# Altium PCB PCB1.PcbDoc
Units mil, origin at the board's own origin, x right, y up, seen from the top; angles counter-clockwise.
Board outline 4675 x 2520 mil, 2 copper layers (Top Layer, Bottom Layer); 66 components, 45 nets, 200 pads, 19 vias.
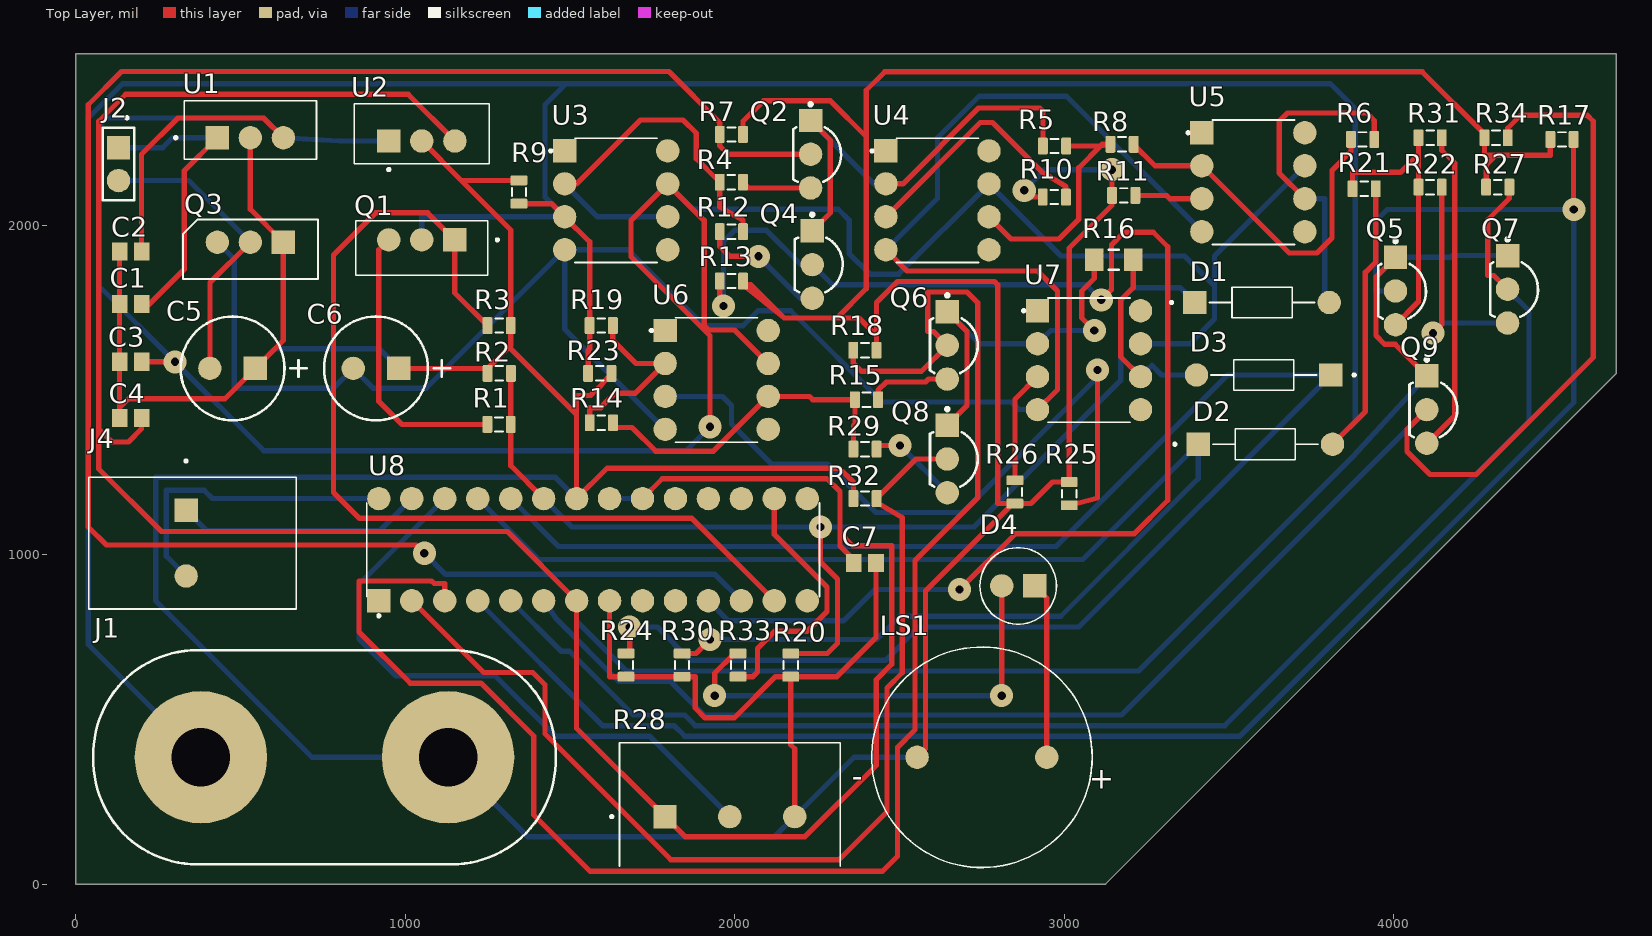
[diagram p0: Top Layer view]
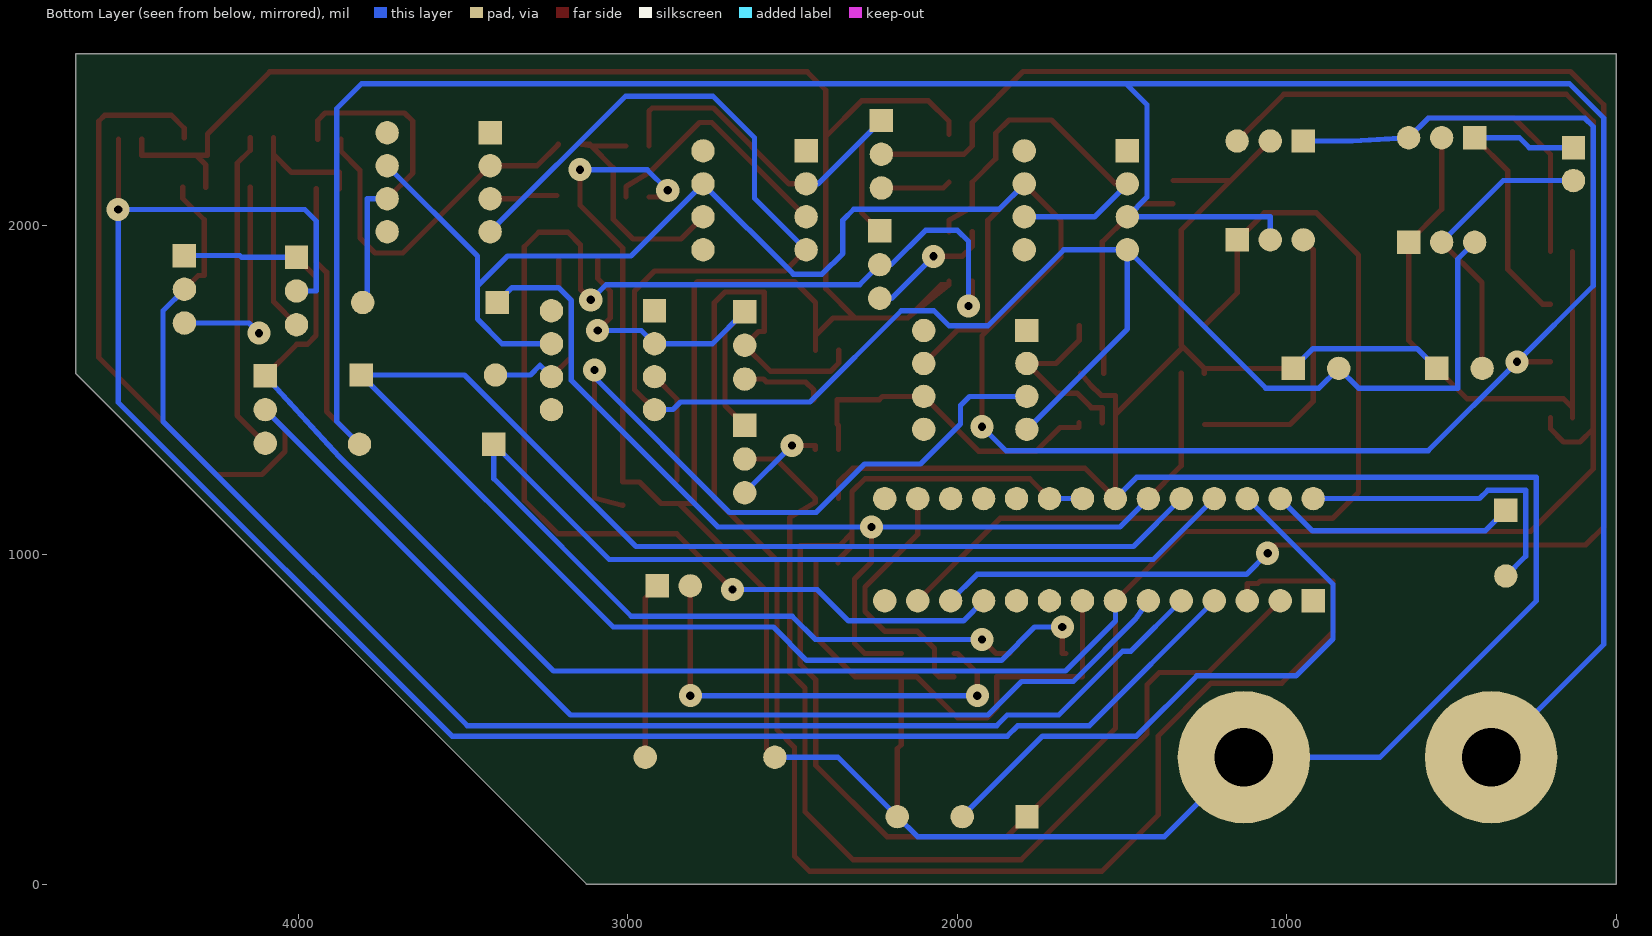
[diagram p1: Bottom Layer view, seen from below]
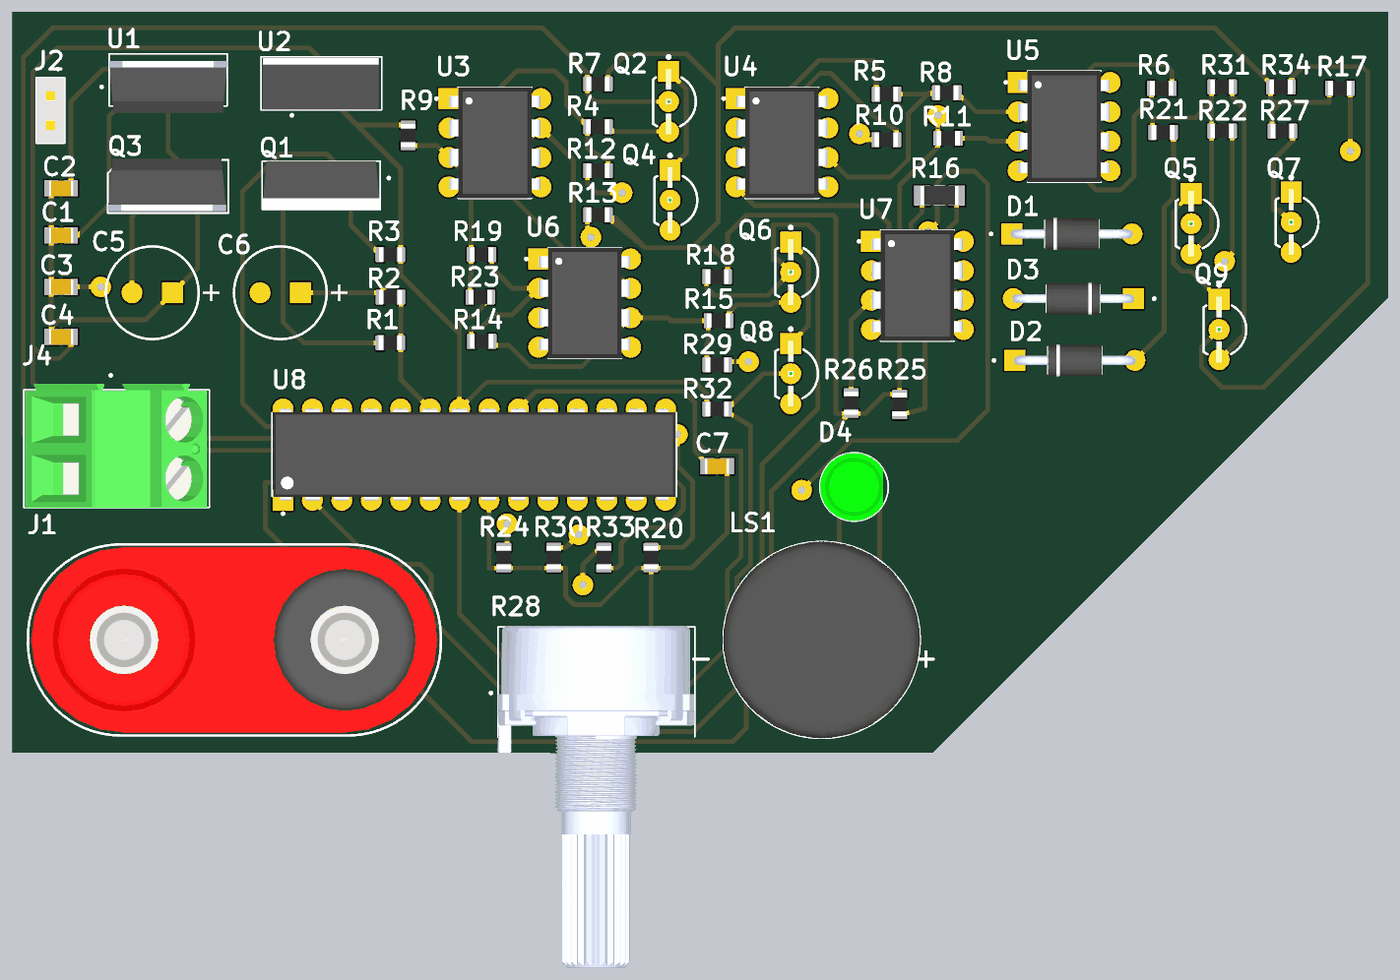
[diagram p2: 3D render of the assembled board from above, using the file's embedded part models]

## Layer stack, top to bottom
Top Solder: solder mask 0.4, Solder Resist, Dk 3.5
Top Layer: signal copper 1.4
Dielectric 1: dielectric 12.6, FR-4, Dk 4.8
Bottom Layer: signal copper 1.4
Bottom Solder: solder mask 0.4, Solder Resist, Dk 3.5

## Board outline
0,0 0,2520 4675,2520 4675,1550 3125,0

## Design rules (kind name [scope] priority, off if disabled: settings)
Clearance [All] p1: gap=16 ignorepadtopadclearanceinfootprint=FALSE
PolygonConnect [All] p1: connectstyle=Relief reliefconductorwidth=10 reliefentries=4 polygonreliefangle="90 Angle" airgapwidth=10
RoutingVias [All] p1: holewidth=25 width=70 viastyle="Through Hole" minholewidth=25 minwidth=70 maxholewidth=25 maxwidth=70
SolderMaskExpansion [All] p1: expansion=6 istentingtop=FALSE
SupplyNets "Schematic Supply Nets_3" [InNet('GND')] p1: voltage=0.000
SupplyNets "Schematic Supply Nets_2" [InNet('+5')] p2: voltage=0.000
SupplyNets "Schematic Supply Nets_1" [InNet('+8')] p3: voltage=0.000
SupplyNets "Schematic Supply Nets" [InNet('-8')] p4: voltage=0.000
Width [All] p1: maxlimit=16 minlimit=16 preferedwidth=16 minimp=50.000000 maximp=50.000000 favimp=50.000000
30 further rules are at their usual default settings.

## Components (designator, comment, footprint, x,y, rotation, side; value= is the part's Value field where it differs from the comment)
C1 "Capacitor 1 uF +/- 10% 50 V 0805" CAPC2013X135X45NL10T25 166.54,1760 r0 top value=0.33µF
C2 "Capacitor 1 uF +/- 10% 50 V 0805" CAPC2013X135X45NL10T25 166.54,1920 r0 top value=0.1µF
C3 "Capacitor 1 uF +/- 10% 50 V 0805" CAPC2013X135X45NL10T25 166.54,1585 r0 top value=0.33µF
C4 "Capacitor 1 uF +/- 10% 50 V 0805" CAPC2013X135X45NL10T25 166.54,1415 r0 top value=0.1µF
C5 "ECA-2AM470" CAPPR65-350-1150X800X1250 476.1,1565 r180 top value=1µF
C6 "ECA-2AM470" CAPPR65-350-1150X800X1250 911.1,1565 r180 top value=1µF
C7 "Capacitor 1 uF +/- 10% 50 V 0805" CAPC2013X135X45NL10T25 2395,975 r180 top value=0.1µF
D1 "1N4733A" DIOAD1036W78L463D272 3600,1765 r0 top
D2 "1N4733A" DIOAD1036W78L463D272 3610,1335 r0 top
D3 "1N4733A" DIOAD1036W78L463D272 3605,1545 r180 top
D4 "Green" LEDRD254W50D500H1060 2860,905 r180 top
J1 "CMP-73906-000010-1_1" FP-2269-2-MFG 755,385 r0 top
J2 "SSW-102-01-X-S" SAMTEC_SSW-102-01-X-S 130,2185 r270 top
J4 "1713723" PHOENIX_1713723 39.72,1235 r270 top
LS1 "PKM17EPP-2002-B0" SPKR_PKM17EPP-2002-B0 2750,385 r180 top
Q1 "IRF3710PBF" TO254P1016X419X2057-3 1050,1955 r180 top
Q2 "2N7000" ONSC-TO-92-3-29-11_AM_BL 2230,2215 r270 top
Q3 "L7908CV" TO254P450X1020X1935-3P 430,1905 r180 top
Q4 "2N7000" ONSC-TO-92-3-29-11_AM_BL 2235,1880 r270 top
Q5 "2N7000" ONSC-TO-92-3-29-11_AM_BL 4005,1800 r270 top
Q6 "2N7000" ONSC-TO-92-3-29-11_AM_BL 2645,1635 r270 top
Q7 "2N7000" ONSC-TO-92-3-29-11_AM_BL 4345,1805 r270 top
Q8 "2N7000" ONSC-TO-92-3-29-11_AM_BL 2645,1290 r270 top
Q9 "2N7000" ONSC-TO-92-3-29-11_AM_BL 4100,1440 r270 top
R1 "1KR5J" RESC0805(2012)_L 1284.57,1395 r180 top value=6.8M
R2 "1KR5J" RESC0805(2012)_L 1285.04,1550 r180 top value=1.5M
R3 "1KR5J" RESC0805(2012)_L 1285,1695 r0 top value=10k
R4 "1KR5J" RESC0805(2012)_L 1989.57,2130 r180 top value=10k
R5 "1KR5J" RESC0805(2012)_L 2970,2240 r180 top value=10k
R6 "1KR5J" RESC0805(2012)_L 3905,2260 r180 top value=1k
R7 "1KR5J" RESC0805(2012)_L 1989.96,2275 r0 top value=10k
R8 "1KR5J" RESC0805(2012)_L 3175.04,2245 r180 top value=1k
R9 "1KR5J" RESC0805(2012)_L 1345,2100 r270 top value=10M
R10 "1KR5J" RESC0805(2012)_L 2969.57,2085 r180 top value=100R
R11 "1KR5J" RESC0805(2012)_L 3180.04,2090 r180 top value=100R
R12 "1KR5J" RESC0805(2012)_L 1989.96,1980 r0 top value=1k
R13 "1KR5J" RESC0805(2012)_L 1990,1830 r0 top value=10k
R14 "1KR5J" RESC0805(2012)_L 1595,1400 r180 top value=10k
R15 "1KR5J" RESC0805(2012)_L 2399.57,1470 r180 top value=10k
R16 "Resistor 1k +/-1% 1206 250 mW" RESC3116X70X50ML13T20 3150,1895 r180 top value=18k
R17 "1KR5J" RESC0805(2012)_L 4510,2260 r180 top value=10k
R18 "1KR5J" RESC0805(2012)_L 2395,1620 r0 top value=10k
R19 "1KR5J" RESC0805(2012)_L 1594.57,1695 r180 top value=1k
R20 "1KR5J" RESC0805(2012)_L 2170,665 r90 top value=10k
R21 "1KR5J" RESC0805(2012)_L 3909.96,2110 r0 top value=499R
R22 "1KR5J" RESC0805(2012)_L 4110,2115 r180 top value=49.9k
R23 "1KR5J" RESC0805(2012)_L 1590.43,1550 r0 top value=1R
R24 "1KR5J" RESC0805(2012)_L 1670,665 r90 top value=10k
R25 "1KR5J" RESC0805(2012)_L 3015,1185 r90 top value=100R
R26 "1KR5J" RESC0805(2012)_L 2850,1190 r270 top value=100R
R27 "1KR5J" RESC0805(2012)_L 4315,2115 r180 top value=10k
R28 "PTN16-A10220K1B1" POT_PTN16-A10220K1B1 1788.15,205 r0 top
R29 "1KR5J" RESC0805(2012)_L 2395,1320 r180 top value=1k
R30 "1KR5J" RESC0805(2012)_L 1840,664.96 r90 top value=10k
R31 "1KR5J" RESC0805(2012)_L 4110.04,2265 r180 top value=560k
R32 "1KR5J" RESC0805(2012)_L 2395,1170 r180 top value=10k
R33 "1KR5J" RESC0805(2012)_L 2010,665 r90 top value=100R
R34 "1KR5J" RESC0805(2012)_L 4310,2265 r180 top value=10k
U1 "L7808CV" TO255P1020X450X1968-3B 530,2265 r0 top
U2 "L7805CV" TO255P1040X460X1968-3 950,2255 r0 top
U3 "TL081CP" DIP794W45P254L959H508Q8 1640,2075 r0 top
U4 "TL081CP" DIP794W45P254L959H508Q8 2615,2075 r0 top
U5 "TL081CP" DIP794W45P254L959H508Q8 3573.7,2130 r0 top
U6 "TL081CP" DIP794W45P254L959H508Q8 1945,1530 r0 top
U7 "TL081CP" DIP794W45P254L959H508Q8 3075,1590 r0 top
U8 "ATMEGA328-PU" DIP787W46P254L3467H508Q28 1570,1015 r90 top

## Footprints (in the part's own frame and the unit in brackets; to place one, negate y for a bottom-side part, rotate by r counter-clockwise, add the part's x,y. Pads: shape width x height; smd on the part's side, far side on the other; paste and mask are expansions set on the pad)
CAPC2013X135X45NL10T25 [mm] "Chip Capacitor, 2-Leads, Body 2.10x1.35mm, IPC Medium Density"
  rect 1.2x1.4 smd: 1(-0.85,0) 2(0.85,0)
  body extent -1.05,-0.67 1.05,0.67, height 1.35
CAPPR65-350-1150X800X1250 [mil] "THD, 2-Leads, Dia 8mm, Pin Spacing 3.5mm"
  rect 71x71 all layers, no hole: 1(-68.9,0)
  round 71 all layers, no hole: 2(68.9,0)
  silkscreen extent -225,-157 157,157, body extent -157,-157 155,157, height 492
DIOAD1036W78L463D272 [mil]
  rect 71x71 all layers, no hole: 1(-203.94,0)
  round 71 all layers, no hole: 2(203.94,0)
  silkscreen extent -279,-47 160,47, body extent -208,-54 208,54, height 107
DIP787W46P254L3467H508Q28 [mil]
  rect 71x71 all layers, no hole: 1(-155,650)
  round 71 all layers, no hole: 2(-155,550) 3(-155,450) 4(-155,350) 5(-155,250) 6(-155,150) 7(-155,50) 8(-155,-50) 9(-155,-150) 10(-155,-250) 11(-155,-350) 12(-155,-450) 13(-155,-550) 14(-155,-650) 15(155,-650) 16(155,-550) 17(155,-450) 18(155,-350) 19(155,-250) 20(155,-150) 21(155,-50) 22(155,50) 23(155,150) 24(155,250) 25(155,350) 26(155,450) 27(155,550) 28(155,650)
  silkscreen extent -205,-687 143,687, body extent -156,-682 156,682, height 180
DIP794W45P254L959H508Q8 [mil]
  rect 71x71 all layers, no hole: 1(-156.3,150)
  round 71 all layers, no hole: 2(-156.3,50) 3(-156.3,-50) 4(-156.3,-150) 5(156.3,-150) 6(156.3,-50) 7(156.3,50) 8(156.3,150)
  silkscreen extent -202,-189 125,189, body extent -155,-189 155,189, height 200
FP-2269-2-MFG [mm]
  round 10.206 hole 4.5 paste-2539.97 mask+0: 2(9.525,0) q(-9.525,0)
  silkscreen extent -17.81,-8.25 17.81,8.25, body extent -17.88,-8.35 17.88,8.35, height 0.25
LEDRD254W50D500H1060 [mil]
  round 71 all layers, no hole: A(50,0)
  rect 71x71 all layers, no hole: C(-50,0)
  silkscreen extent -116,-116 116,116, body extent -98,-116 116,116, height 378
ONSC-TO-92-3-29-11_AM_BL [mil] "TO, 3-Leads, Body Dia 4.7mm, Pitch 2.6mm"
  rect 71x71 all layers, no hole: 1(-102.36,0)
  round 71 all layers, no hole: 2(0,0) 3(102.36,0)
  silkscreen extent -156,-53 84,92, body extent -112,-53 112,93, height 210
PHOENIX_1713723 [mil]
  rect 71x71 all layers, no hole: 1(100,295.28)
  round 71 all layers, no hole: 2(300,295.28)
  silkscreen extent -53,0 400,630, body extent -21,5 401,622, height 704
POT_PTN16-A10220K1B1 [mil]
  rect 71x71 all layers, no hole: 1(0,0)
  round 71 all layers, no hole: 2(196.85,0) 3(393.7,0)
  silkscreen extent -165,-150 531,224, body extent -140,-934 530,227, height 788
RESC0805(2012)_L [mm] "Chip Resistor, Body 2.0x1.3mm, IPC High Density"
  rrect25% 0.76x1.3 smd: 1(-0.9,0) 2(0.89,0)
  silkscreen extent -0.3,-0.55 0.3,0.55, body extent -1,-0.62 1,0.63, height 0.6
RESC3116X70X50ML13T20 [mm] "Chip Resistor, 2-Leads, Body 3.25x1.65mm, IPC Low Density"
  rect 1.4x1.75 smd: 1(-1.5,0) 2(1.5,0)
  silkscreen extent -0.4,-0.78 0.4,0.78, body extent -1.63,-0.82 1.63,0.82, height 0.7
SAMTEC_SSW-102-01-X-S [mil]
  rect 71x71 all layers, no hole: 01(-50,0)
  round 71 all layers, no hole: 02(50,0)
  silkscreen extent -144,-47 110,47, body extent -110,-48 110,48, height 336
SPKR_PKM17EPP-2002-B0 [mil]
  round 71 all layers, no hole: N(196.85,0) P(-196.85,0)
  silkscreen extent -335,-335 334,335, body extent -335,-335 335,334, height 339
TO254P450X1020X1935-3P [mil]
  rect 71x71 all layers, no hole: 1(-200,-43)
  round 71 all layers, no hole: 2(-100,-43) 3(0,-43)
  silkscreen extent -305,-112 105,69, body extent -297,-115 105,62, height 775
TO254P1016X419X2057-3 [mil]
  rect 71x71 all layers, no hole: 1(-100,0)
  round 71 all layers, no hole: 2(0,0) 3(100,0)
  silkscreen extent -233,-58 200,107, body extent -200,-58 200,107, height 810
TO255P1020X450X1968-3B [mil]
  rect 71x71 all layers, no hole: 1(-100.39,0)
  round 71 all layers, no hole: 2(0,0) 3(100.39,0)
  silkscreen extent -230,-65 201,112, body extent -201,-89 201,89, height 775
TO255P1040X460X1968-3 [mil]
  rect 71x71 all layers, no hole: 1(0,0)
  round 71 all layers, no hole: 2(100.39,0) 3(200.79,0)
  silkscreen extent -104,-90 305,113, body extent -98,-68 295,108, height 775

## Part data
C1 C2 C3 C4 C7: library part CMP-001-00007-6, "Chip Capacitor, 1 uF, +/- 10%, 50 V, 0805 (2012 Metric)", Capacitor Type=Ceramic, Case/Package=0805, Max Operating Temperature=125°C, Min Operating Temperature=-55°C, Tolerance=10%, Voltage Rating=50V, Mounting Technology=SM, Pins=2, RoHS Compliant=True
C5 C6: library part CMP-001-00036-7, "Aluminum Electrolytic Capacitor, 47 uF, +/- 20%, 100 V, -40 to 85 degC, 2-Pin THD, RoHS, Bulk", Capacitor Type=Electrolytic, Case/Package=Radial, Manufacturer=Panasonic, Max Operating Temperature=85°C, Min Operating Temperature=-40°C, Package Description="2-Pin Radial Lead, Dia 8 mm, Height 12.5 mm", Package Quantity=200, Package Reference=CAPPR65-350-1150X800X1250, Ripple Current=180mA, Tolerance=20%, Voltage Rating=100V, Datasheet URL=http://industrial.panasonic.com/cdbs/www-data/pdf/RDF0000/ABA0000C1047.pdf, Datasheet Version=Mar-16, Diameter=8mm, Lead Pitch=3.5mm, Manufacturer URL=http://www.panasonic.com/, Mounting Technology=TH, Packaging=Bulk, Pins=2, Ripple Current (AC)=180mA, RoHS Compliant=True
D1 D2 D3: "Zener Diode 5.1 V 1 W Â±5% Through Hole DO-41", Package="DO-41 ON Semiconductor", Check_prices=https://www.snapeda.com/parts/1N4733A/Onsemi/view-part/?ref=eda, MF=onsemi, MP=1N4733A, SnapEDA_Link=https://www.snapeda.com/parts/1N4733A/Onsemi/view-part/?ref=snap
D4: library part L-53GD, "LED 5mm Green 568nm 20mcd/10mA 60Â°", Package=CDIP-28, Availability=Unavailable, Check_prices=https://www.snapeda.com/parts/L-53GD/Kingbright/view-part/?ref=eda, MF=Kingbright, MP=L-53GD, Price=None, SnapEDA_Link=https://www.snapeda.com/parts/L-53GD/Kingbright/view-part/?ref=snap
J1: library part CMP-002-00255-1, "CONN DBL BANANA JACK TURRET", Color=Red, Current Rating=15A, Package Quantity=5, Voltage Rating=2.5kV, Voltage Rating (DC)=70V, Body Material=PC, Contact Material=Brass, Contact Plating=Tin, Depth=16mm, Design Item ID=CMP-73906-000010-1_1, Gender=Female, Height=0.375inch, Housing Color=Red, Housing Material=Polycarbonate, Insulation="Mating End Insulated", Insulation Material=Polycarbonate, Lead Free="Lead Free", Length=24inch, Max Current Rating=15A, Mount=Panel, Number Of Contacts=2, Number of Ports=2, Orientation=Straight, Packaging=Bulk, REACH SVHC="No SVHC", RoHS Compliant=Yes, Source=Schlib2.SchLib, Termination=Solder, Weight=0.033lb, Width=4inch
J2: "2 Position Receptacle Connector Through Hole", Package=None, Availability=Good, Check_prices=https://www.snapeda.com/parts/SSW-102-01-G-S/Samtec/view-part/4872079/?ref=eda, MF=Samtec, MP=SSW-102-01-G-S, Price=None, Purchase-URL=https://pricing.snapeda.com/search/part/SSW-102-01-G-S/?ref=eda, SnapEDA_Link=https://www.snapeda.com/parts/SSW-102-01-G-S/Samtec/view-part/4872079/?ref=snap
J4 R28: Package=None, Availability=Unavailable, Price=None
  J4: MF="{'manufacturer': u'Phoenix Contact'}", MP=1713723
  R28: MF="{'manufacturer': u'CUI Devices'}", MP=PTN16-A10220K1B1
LS1: "Buzzers Transducer, Externally Driven Piezo 3V 2kHz 70dB @ 3V, 10cm Through Hole PC Pins", Package=None, Availability=Unavailable, MP=PKM17EPP-2002-B0, Price=None
Q1: "MOSFET, Power,N-Ch,VDSS 100V,RDS(ON) 18 Milliohms,ID 7.3A,SO-8,PD 2.5W,VGS+/-20V", Package="TO-220-3 Infineon", Check_prices=https://www.snapeda.com/parts/IRF3710PBF/Infineon+Technologies/view-part/?ref=eda, MF="Infineon Technologies", MP=IRF3710PBF, SnapEDA_Link=https://www.snapeda.com/parts/IRF3710PBF/Infineon+Technologies/view-part/?ref=snap
Q2 Q4 Q5 Q6 Q7 Q8 Q9: library part CMP-013-00020-4, "Small Signal MOSFET, 200 mA, 60 V, N-Channel, 3-Pin TO-92, Bulk Box", Case/Package=TO-92, Input Capacitance=50pF, Manufacturer="Fairchild Semiconductor", Max Operating Temperature=150°C, Min Operating Temperature=-55°C, Nominal Dual Supply Voltage=60V, Package Description="3-Pin Transistor Outline, Body 4.825 x 3.685 mm, Pitch 1.27 mm", Package Quantity=2000, Package Reference=TO-92-3-29-11_AM_BL, Package Version="Rev. AM", Power=400mW, Datasheet URL=http://www.onsemi.com/pub_link/Collateral/2N7000-D.PDF, Datasheet Version="Rev. 8, 04/2011", Elements=1, Mounting Technology=TH, Nominal Vgs=2.1V, Packaging=Bulk, Pins=3, Rds On Max=5Ohm, RoHS Compliant=True
Q3: "Linear Voltage Regulator IC Negative Fixed 1 Output  1.5A TO-220", Package="TO-220-3 STMicroelectronics", Check_prices=https://www.snapeda.com/parts/L7908CV/STMicroelectronics/view-part/?ref=eda, MF=STMicroelectronics, MP=L7908CV, SnapEDA_Link=https://www.snapeda.com/parts/L7908CV/STMicroelectronics/view-part/?ref=snap
R1 R2 R3 R4 R5 R6 R7 R8 R9 R10 R11 R12 R13 R14 R15 R17 R18 R19 R20 R21 R22 R23 R24 R25 R26 R27 R29 R30 R31 R32 R33 R34: library part CMP-009-00076-2, "1K 0.125W 5% 0805 (2012 Metric)  SMD", Case/Package=0805, Power=125mW, Tolerance=5%, Mounting Technology=SMT, Pins=2
R16: library part CMP-009-00011-5, "Chip Resistor, 1 KOhm, +/- 1%, 0.25 W, -55 to 155 degC, 1206 (3216 Metric)", Case/Package=1206, Max Operating Temperature=155°C, Min Operating Temperature=-55°C, Power=250mW, Tolerance=1%, Voltage Rating=200V, Mounting Technology=SM, Pins=2, RoHS Compliant=True
U1: "Linear Voltage Regulator IC Positive Fixed 1 Output 1.5A TO-220", Package="TO-220-3 STMicroelectronics", Check_prices=https://www.snapeda.com/parts/L7808CV/STMicroelectronics/view-part/?ref=eda, MF=STMicroelectronics, MP=L7808CV, SnapEDA_Link=https://www.snapeda.com/parts/L7808CV/STMicroelectronics/view-part/?ref=snap
U2: "Linear Voltage Regulator IC Positive Fixed 1 Output 1.5A TO-220", Package="TO-220-3 ON Semiconductor", Availability="In Stock", Check_prices=https://www.snapeda.com/parts/L7805CV/STMicroelectronics/view-part/?ref=eda, MF=STMicroelectronics, MP=L7805CV, Price=None, Purchase-URL=https://pricing.snapeda.com/search/part/L7805CV/?ref=eda, SnapEDA_Link=https://www.snapeda.com/parts/L7805CV/STMicroelectronics/view-part/?ref=snap
U3 U4 U5 U6 U7: "Single, 30-V, 3-MHz, 13-V/Âµs slew rate, In to V+, JFET-input op amp", Package="PDIP-8 Texas", Availability="In Stock", Check_prices=https://www.snapeda.com/parts/TL081CP/Texas+Instruments/view-part/?ref=eda, MF="Texas Instruments", MP=TL081CP, Price=None, Purchase-URL=https://pricing.snapeda.com/search/part/TL081CP/?ref=eda, SnapEDA_Link=https://www.snapeda.com/parts/TL081CP/Texas+Instruments/view-part/?ref=snap
U8: "AVR AVRÂ® ATmega Microcontroller IC 8-Bit 20MHz 32KB (16K x 16) FLASH 28-PDIP", Package="DIP-28 Microchip Technology", Availability="In Stock", Check_prices=https://www.snapeda.com/parts/ATMEGA328-PU/Microchip/view-part/?ref=eda, MF=Microchip, MP=ATMEGA328-PU, Price=None, Purchase-URL=https://pricing.snapeda.com/search/part/ATMEGA328-PU/?ref=eda, SnapEDA_Link=https://www.snapeda.com/parts/ATMEGA328-PU/Microchip/view-part/?ref=snap

## Via types
v1: diameter 70, hole 25, Top Layer to Bottom Layer, 19 vias

## Nets (pads, with @x,y where several pads share a name; then routed paths per layer and width w, separated by ;. In a path a pad name is that pad's centre, name@x,y a point inside that pad or via, vN(x,y) a via of type N, cw(c..) or ccw(c..) an arc to the next point about the centre after c; other vN are vias at no path point)
+5: C4.2 C7.2 Q5.1 Q7.1 Q9.1 R28.1 U2.3 U8.7 U8.20 U8.21 | length 11286.2
  Top Layer w16: C4.2 200,1382 160,1342 110,1342 70,1382 ; U2.3 1008.79,2397 152,2397 70,2315 70,1382 ; U8.20 1780,1230 2280,1230 2319,1191 2319,1065 ; C7.2 2361.54,983.5 2319,1026.04 2319,1065 ; Q5.1 3945.5,1842.86 3945.5,1665 3972.5,1638 4004.36,1638 Q9.1 ; 70,1382 70,1260 260,1070 1310,1070 U8.7 1520,473.15 R28.1 1849.15,144 2213,144 2429.65,360.65 2429.65,621 2476.3,667.65 2476.3,1027 2357,1027 2319,1065
  Bottom Layer w16: U8.7 1520,798.39 1671.39,647 3225,647 3874,1296 Q9.1 ; U8.21 U8.20 ; Q5.1 4172,1902.36 4177,1907.36 Q7.1
+8: C2.2 C3.2 U1.3 U2.1 U3.7 U4.7 U5.7 U6.7 U7.7 | length 8897.3
  Top Layer w16: C3.2 v1(301,1585) ; C2.2 200,2215 310,2325 570.39,2325 U1.3 ; v1(1925,1388) 1925,1664 1685,1904 1685,2013.7 U3.7 1907,2014.3 1907,1695 1920.14,1681.86 1999.44,1681.86 U6.7
  Bottom Layer w16: U2.1 801,2255 U1.3 570.39,2325 96,2325 70,2299 70,1816 v1(301,1585) 571,1315 1852,1315 v1(1925,1388) ; U3.7 1873.3,2048 2314,2048 2347,2015 2347,1914 2410,1851 2497.3,1851 U4.7 2990.3,1906 3365,1906 3456,1815 ; U7.7 3381,1640 3456,1715 3456,1815 ; U5.7 3456,1906 3456,1815
-8: C6.2 Q3.3 U3.4 U4.4 U5.4 U6.4 U7.4 | length 6422.1
  Top Layer w16: U4.4 2522.84,1860.86 2918.14,1860.86 2979,1800 2979,1500.3 U7.4
  Bottom Layer w16: Q3.3 481,1897 481,1505 782.2,1505 C6.2 902.2,1505 1063.7,1505 U3.4 ; U6.4 1483.7,1685 U3.4 ; U4.4 2615,2081.3 2615,2265 2741,2391 3006.4,2391 U5.4 ; U7.4 2863,1440 2840,1463 2447,1463 2170,1740 2070.63,1740 2025.04,1694.41 1907,1694.41 1676.41,1925 U3.4
Areading: D3.1 R24.2 U8.24 | length 5384.2
  Top Layer w16: R24.2 1681,700.04 v1(1681,780)
  Bottom Layer w16: U8.24 1465.5,1024.5 2974.5,1024.5 3495,1545 D3.1 3043.94,780 2557.87,780 2456.87,679 1866,679 1765,780 v1(1681,780)
"GATE 0.1-0.5M": Q9.2 R34.1 U8.6 | length 5136.1
  Top Layer w16: Q9.2 4040,1380 4040,1313 4110,1243 4250,1243 4605,1598 4605,2315 4586.57,2333.43 4385,2333.43 4345.43,2293.87 R34.1
  Bottom Layer w16: U8.6 1460,803 1648,615 1805,615 1907,513 3173,513 Q9.2
"GATE 0.1-10k": Q5.2 R17.1 U8.4 | length 5601.6
  Top Layer w16: R17.1 4545.43,2047.57 v1(4546,2047)
  Bottom Layer w16: U8.4 1599,481 1816,481 1848,449 3532.99,449 4546,1462.01 v1(4546,2047) 3980,2047 3945,2012 3945,1800 Q5.2
"GATE 0.5V": Q4.2 R13.1 U8.11 | length 4249.5
  Top Layer w16: R13.1 1954.57,1765.43 v1(1966,1754) ; v1(2682,894) 2851,1063 3212,1063 3314,1165 3314,1934 3270,1978 3181,1978 3143,1940 3143,1804 v1(3112,1773)
  Bottom Layer w16: U8.11 1981,799 2330,799 2425,894 v1(2682,894) ; v1(1966,1754) 1966,1951 1999,1984 2096,1984 2200,1880 Q4.2 2296,1819 3066,1819 v1(3112,1773)
"GATE 5V": Q2.2 R7.1 U8.12 | length 5735.5
  Top Layer w16: v1(1058,1004) 1033,1029 93,1029 38,1084 38,2365 139,2466 1800,2466 1954.53,2311.47 R7.1 1954.53,2240 1979.53,2215 Q2.2
  Bottom Layer w16: v1(1058,1004) 1122,940 1940,940 U8.12
"GATE 10-100k": Q7.2 R27.1 U8.5 | length 4429.7
  Top Layer w16: Q7.2 4303,1847 4285,1847 4285,2016 4350.43,2081.43 R27.1
  Bottom Layer w16: U8.5 1473,707 1497.78,707 1691.79,513 1848,513 1880,481 3487,481 4410,1404 4410,1740 Q7.2
"GATE 20mA": Q8.2 R32.1 U8.2 | length 3192.7
  Top Layer w16: U8.2 1238.09,641.91 1386.91,641.91 1423.79,605.04 1423.79,456.21 1806,74 2316,74 2461.65,219.65 2461.65,594.65 2508.3,641.3 2508.3,1112.08 2430.43,1159 R32.1 2550.43,1290 Q8.2
"GATE 20V": Q1.1 R3.1 U8.13 | length 2950.5
  Top Layer w16: R3.1 1150,1794.57 Q1.1 1068,2037 910,2037 782,1909 782,1189 861,1110 1870,1110 U8.13
"GATE 200mA": Q6.2 R18.1 U8.3 | length 5073.5
  Top Layer w16: U8.3 1120,912 1088,912 1080,920 860,920 860,765 1015.09,609.91 1229.52,609.91 1390,449.43 1390,210 1561,39 2448,39 2493.65,84.65 2493.65,415 2547,468.35 2547,982 2737,1172 2737,1764.61 2704.75,1796.86 2585.5,1796.86 2585.5,1677 2603,1677 Q6.2 2566,1556 2385,1556 2359.57,1581.43 R18.1
GND: C1.1 C2.1 C3.1 C4.1 C5.1 C6.1 C7.1 J1.2 LS1.N Q3.1 R2.2 R3.2 R7.2 R9.1 R10.2 R11.2 R13.2 R17.2 R18.2 R20.1 R23.2 R24.1 R25.2 R26.2 R27.2 R28.3 R30.1 R32.2 R34.2 U1.2 U2.2 U8.8 U8.22 | length 19473.2
  Top Layer w16: C2.1 C1.1 C3.1 133.07,1526.93 133.07,1446.14 ; U1.2 530,2048 Q3.1 630,1650 C5.1 453.07,1473.07 160,1473.07 133.07,1446.14 ; C6.1 R2.2@1250,1565 ; U2.2 1169.96,2135.43 ; R2.2 R2.2@1250,1565 ; R9.1 1169.96,2135.43 ; U8.8 1620,629.57 R24.1 1754,629.57 1754.04,629.53 R30.1 1880,629.53 1880,534.6 1910,504.6 1998.46,504.6 2123.42,629.57 R20.1 ; R23.2 1595,1515 1563.85,1483.85 1520,1481.96 1520,1425 ; R7.2 2025,2315 2087,2377 2290,2377 2399,2268 ; R13.2 R13.2@2025.04,1819 ; R28.3 2181.85,411 2170,422.85 R20.1 ; R32.2 2359.96,1220.04 2318,1262 1612,1262 U8.22 1520,1425 ; C7.1 2428.47,748.03 2310,629.57 R20.1 ; R18.2 2430.04,1665 ; LS1.N 2579,410.85 2579,889.96 R26.2@2844,1154.96 ; v1(2878.5,2105.5) 2899,2085 R10.2 ; v1(3145,2168) R11.2 3145,2060 3015,1930 R25.2 2964.08,1220.04 2899,1154.96 R26.2 R26.2@2844,1154.96 ; R27.2 4279.96,2181.96 4310,2212 ; R17.2 4474.96,2212 4310,2212 ; 133.07,1446.14 C4.1 133.07,1446.14 ; 1169.96,2135.43 1320.04,1985.35 R3.2 1320.04,1635.04 1315,1630 ; R2.2@1250,1565 1315,1630 ; 1315,1630 1520,1425 ; R13.2@2025.04,1819 2150,1718 ; R13.2@2025.04,1819 2049,1819 2150,1718 ; 2150,1718 2310,1718 ; 2310,1718 2399,1807 2399,2268 ; 2310,1718 2377.04,1718 2430.04,1665 ; 2399,2268 2399,2409 2455,2465 4085.96,2465 4274.96,2276 R34.2 4274.96,2212 4310,2212 ; 2430.04,1665 2430.04,1765 2493.9,1828.86 2787.76,1828.86 2798,1818.62 2798,1154.96 R26.2@2844,1154.96
  Bottom Layer w16: C5.1 605,1625 920,1625 C6.1 ; U8.22 1455,1235 243,1235 243,859 717,385 J1.2 1371,144 2120.85,144 R28.3 2361.85,385 LS1.N ; v1(2878.5,2105.5) 2941,2168 v1(3145,2168)
In: D2.2 J1.q Q1.2 R9.2 R19.2 R21.2 R23.1 U3.3 | length 9500.2
  Top Layer w16: R9.2 1443.74,2064.96 U3.3 1559.53,1949.17 R19.2 1559.53,1624.53 1555,1620 R23.1 ; D2.2 3913.5,1434.56 3913.5,1856.5 3945,1888 R21.2
  Bottom Layer w16: J1.q 38,727 38,2325 142,2429 1488,2429 ; Q1.2 1050,2025 U3.3 1424,2084.7 1424,2365 1488,2429 ; D2.2 3883,1404.06 3883,2354 3808,2429 1488,2429
NetC1_2: C1.2 J2.01 U1.1 | length 926.2
  Top Layer w16: C1.2 224,1760 329,1865 329,2164.39 U1.1
  Bottom Layer w16: J2.01 264,2235 294,2265 U1.1
NetC5_2: C5.2 J2.02 Q3.2 | length 911.3
  Top Layer w16: C5.2 407.2,1825.2 Q3.2
  Bottom Layer w16: J2.02 343,2135 Q3.2
NetD1_2: D1.2 R6.1 U5.6 | length 1013.7
  Top Layer w16: U5.6 3652,2158 3652,2315 3677,2340 3918,2340 3940.43,2317.57 R6.1
  Bottom Layer w16: U5.6 3790,2080 3790,1778.94 D1.2
NetD3_2: D3.2 R16.1 U7.6 | length 592
  Top Layer w16: R16.1 3209.06,1810 3171,1771.94 3171,1600.3 U7.6
  Bottom Layer w16: U7.6 3265.8,1574.5 3295.3,1545 D3.2
NetD4_A: D4.A R33.2 | length 1367.9
  Top Layer w16: v1(1939,572) 1939,640.04 1999,700.04 R33.2 ; v1(2810,572) D4.A
  Bottom Layer w16: v1(1939,572) v1(2810,572)
NetD4_C: D4.C LS1.P | length 535.3
  Top Layer w16: D4.C 2946.85,868.15 LS1.P
NetJ4_1: J4.1 U8.27 | length 751.7
  Bottom Layer w16: J4.1 398,1072 922,1072 U8.27
NetJ4_2: J4.2 U8.28 | length 940.2
  Bottom Layer w16: J4.2 275,995 275,1195 390,1195 415,1170 U8.28
NetQ1_3: Q1.3 R1.2 | length 860.9
  Top Layer w16: Q1.3 920,1925 920,1465 990,1395 R1.2
NetQ2_1: Q2.1 Q4.1 R5.2 U4.2 | length 1372.1
  Top Layer w16: Q2.1 2290,2257.36 2290,2037.36 Q4.1 ; U4.2 2510,2125 2740,2355 2925.59,2355 2934.96,2345.63 R5.2
  Bottom Layer w16: Q2.1 2422.36,2125 U4.2
NetQ2_3: Q2.3 R4.1 | length 212.2
  Top Layer w16: R4.1 2042.36,2112.64 Q2.3
NetQ4_3: Q4.3 R12.1 | length 390.4
  Top Layer w16: R12.1 1954.53,1935.47 1985,1905 v1(2072,1905)
  Bottom Layer w16: v1(2072,1905) 2199.36,1777.64 Q4.3
NetQ5_3: Q5.3 R21.1 R22.2 R31.2 | length 869.6
  Top Layer w16: R21.1 3874.53,2160 4020,2160 4075,2215 ; Q5.3 4074.96,1767.6 R22.2 4074.96,2189 4075,2189.04 4075,2215 ; R31.2 4075,2215
NetQ6_1: Q6.1 Q8.1 R16.2 U7.2 | length 1144
  Top Layer w16: Q8.1 2705,1452.36 2705,1677.36 Q6.1 ; v1(3090.94,1680) 3053,1717.94 3053,1799.84 3090.94,1837.78 R16.2
  Bottom Layer w16: Q6.1 2742.36,1640 U7.2 2958.7,1680 v1(3090.94,1680)
NetQ6_3: Q6.3 R15.1 | length 252.9
  Top Layer w16: R15.1 2435,1499 2460,1524 2579.28,1524 2587.91,1532.64 Q6.3
NetQ7_3: Q7.3 R22.1 | length 692.6
  Top Layer w16: v1(4119,1672) 4145.43,1698.43 R22.1
  Bottom Layer w16: v1(4119,1672) 4149.64,1702.64 Q7.3
NetQ8_3: Q8.3 R29.1 | length 284.9
  Top Layer w16: R29.1 2430.43,1331 v1(2501.64,1331)
  Bottom Layer w16: v1(2501.64,1331) Q8.3
NetQ9_3: Q9.3 R31.1 | length 978.9
  Top Layer w16: Q9.3 4185,1422.64 4185,2187.47 4145.47,2227 R31.1
NetR4_2: R4.2 R12.2 U3.2 U3.6 | length 1219.9
  Top Layer w16: U3.2 1520,2125 1714,2319 1843,2319 1882.91,2279.09 1882.91,2201.62 R4.2 1954.53,2055 2025,2015 R12.2
  Bottom Layer w16: U3.2 1583.7,2025 U3.6
NetR5_1: R5.1 R8.2 U4.6 | length 741.7
  Top Layer w16: U4.6 2838.3,1958 2984,1958 3044,2018 3044,2174 3110,2240 ; R5.1 3110,2240 ; 3110,2240 R8.2 3115,2245 3110,2240
NetR6_2: R6.2 R8.1 U5.2 | length 1080.5
  Top Layer w16: R8.1 3275.47,2180 U5.2 3682.4,1915 3766.4,1915 3812,1960.6 3812,2166.04 3869.96,2224 R6.2
NetR10_1: R10.1 U4.3 | length 771.1
  Top Layer w16: U4.3 2744.7,2311 2782,2311 2931,2162 3005,2117 R10.1
NetR11_1: R11.1 U5.3 | length 206.1
  Top Layer w16: R11.1 3311,2090 3321,2080 U5.3
NetR14_1: R14.1 R15.2 R29.2 U6.6 | length 1002.7
  Top Layer w16: R14.1 1630.43,1386 1688,1386 1760,1314 1935.3,1314 U6.6 2227,1480 2237,1470 R15.2 2364.53,1396.57 2359.96,1392 R29.2
NetR14_2: R14.2 R19.1 U6.2 | length 562.9
  Top Layer w16: R14.2 1559.96,1446 1593,1446 1637,1490 1698.7,1490 U6.2 1700,1580 1630,1650 R19.1
NetR25_1: R25.1 U6.3 | length 2160.1
  Top Layer w16: R25.1 3101,1171.57 v1(3101,1560)
  Bottom Layer w16: U6.3 1962.63,1480 1989.81,1452.81 1989.81,1396.52 2111.33,1275 2281,1275 2428,1128 2691,1128 3101,1538 v1(3101,1560)
NetR26_1: R26.1 U7.3 | length 343
  Top Layer w16: R26.1 2850,1471.3 U7.3
NetR28_2: R28.2 U8.26 | length 1882
  Bottom Layer w16: U8.26 860,910 860,744 972,632 1273,632 1456,449 1741,449 R28.2
NetR33_1: R33.1 U8.16 | length 801.9
  Top Layer w16: R33.1 2055,629.57 2069,643.57 2069,715 2121,767 2219,767 2279.5,827.5 2279.5,901.5 2120,1061 U8.16
Rreading: D2.1 R30.2 U8.25 | length 4298.2
  Top Layer w16: R30.2 1882.37,700 v1(1925,742.63)
  Bottom Layer w16: U8.25 1405,985 3056.06,985 D2.1 3406.06,1230.06 2989,813 2500.8,813 2430.43,742.63 v1(1925,742.63)
Vreading: D1.1 R1.1 R2.1 R20.2 U8.23 | length 3423.2
  Top Layer w16: R2.1 1320.47,1472.47 1320,1472 R1.1 1320,1270 U8.23 ; R20.2 2280.46,700.04 2311.5,731.08 2311.5,925.79 2260,977.29 v1(2260,1084)
  Bottom Layer w16: U8.23 1506,1084 v1(2260,1084) 2726.36,1084 3171,1528.64 3171,1771 3210,1810 3351.06,1810 D1.1
pads on no net: U3.1 U3.5 U3.8 U4.1 U4.5 U4.8 U5.1 U5.5 U5.8 U6.1 U6.5 U6.8 U7.1 U7.5 U7.8 U8.1 U8.9 U8.10 U8.14 U8.15 U8.17 U8.18 U8.19

## Text inside footprints (layer, text, board x,y; h text height)
LS1: Top Overlay "+" at 3151.57,345.63 h66 r180; Top Overlay "-" at 2387.8,345.63 h66 r180; Mechanical 13 "+" at 3151.57,345.63 h66 r180; Mechanical 13 "-" at 2387.8,345.63 h66 r180
R28: Mechanical 13 "PCB Edge" at 2349.17,67.2 h35.43